# Altium PCB Parte_digital.PcbDoc
Units mm, origin at the board's own origin, x right, y up, seen from the top; angles counter-clockwise.
Board outline 150 x 100 mm, 2 copper layers (Top Layer, Bottom Layer); 92 components, 93 nets, 385 pads, 107 vias.
Unrouted connection lines stored in the file: 1.
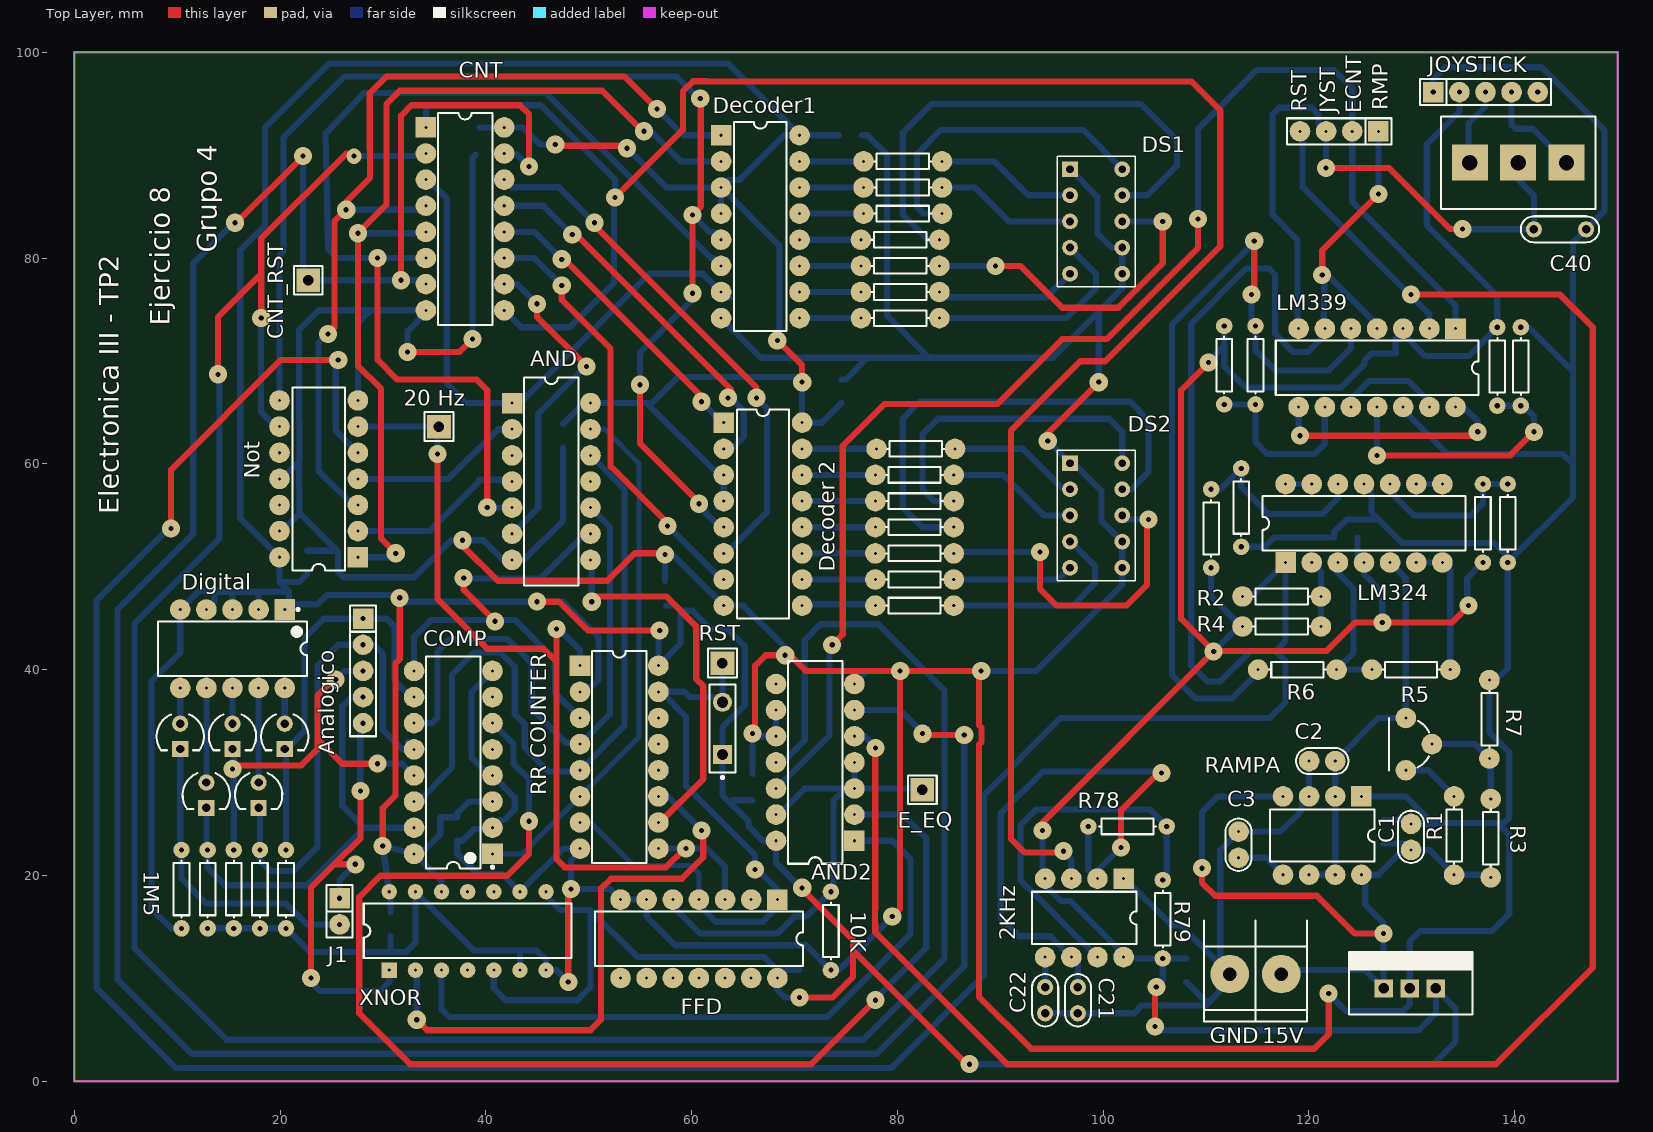
[diagram p0: Top Layer view]
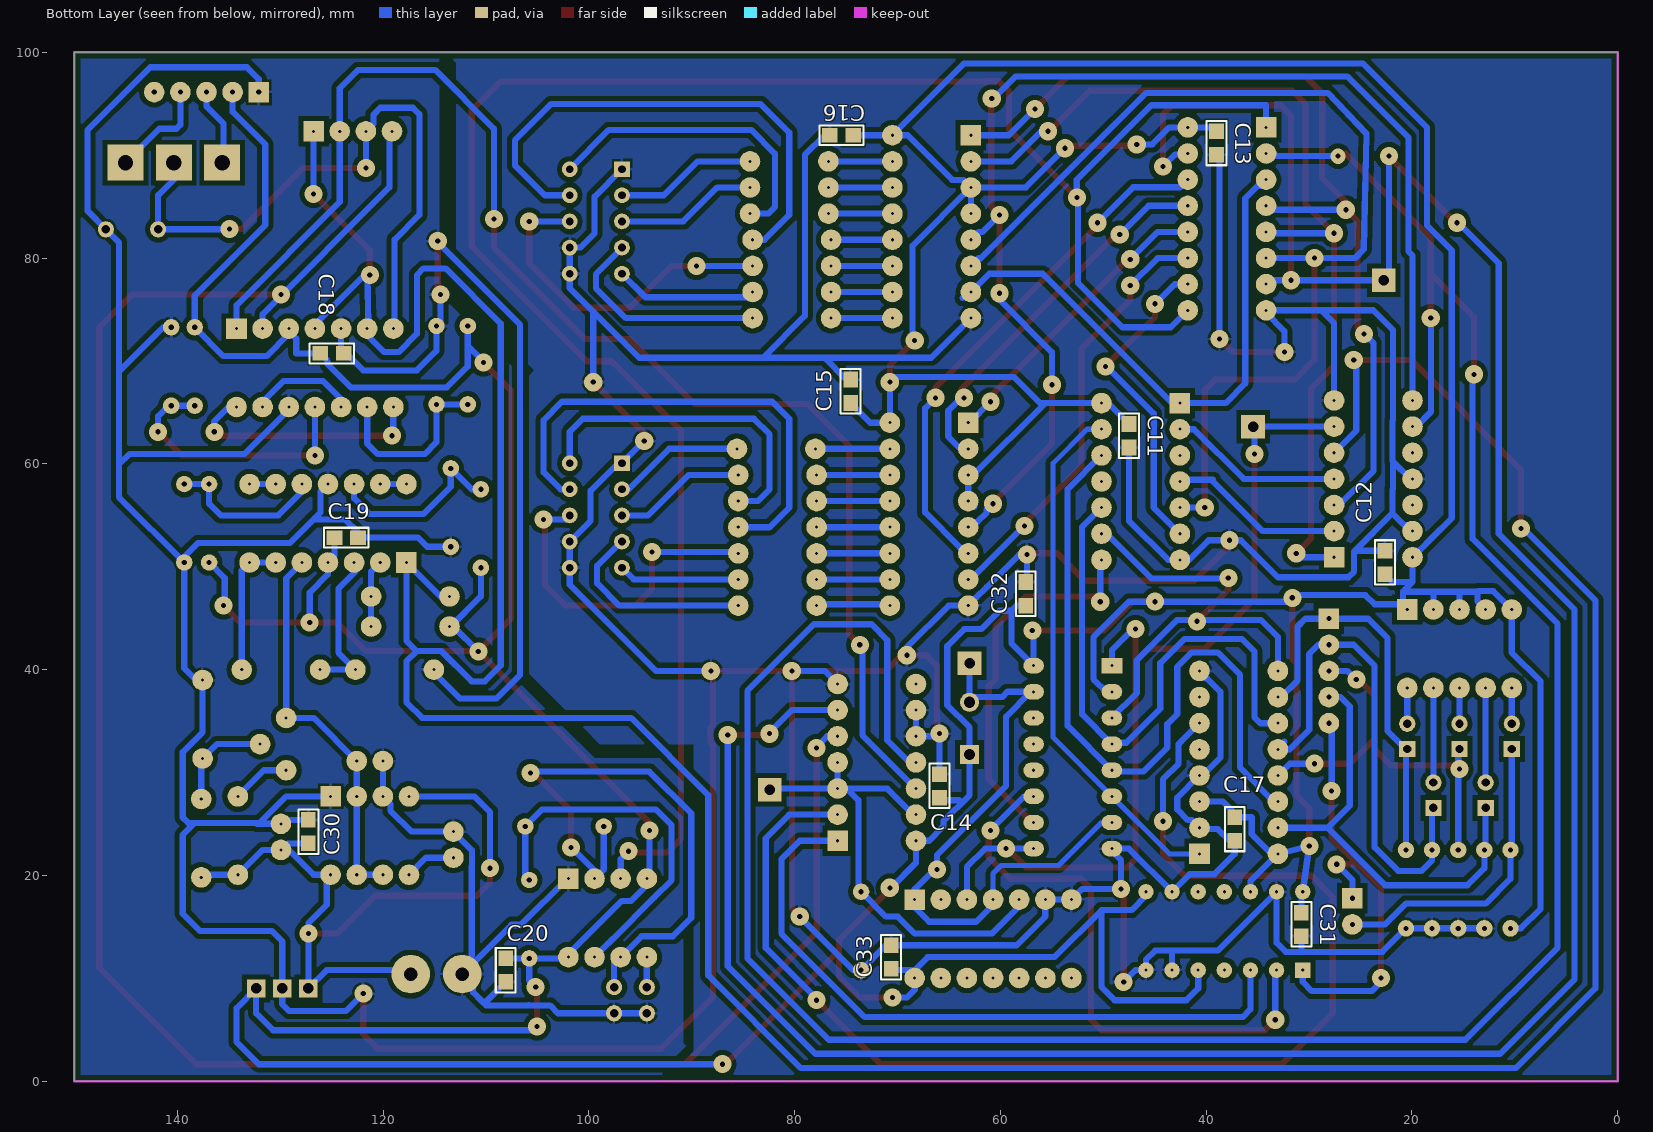
[diagram p1: Bottom Layer view, seen from below]

## Layer stack, top to bottom
Top Solder: solder mask 0.0102, Solder Resist, Dk 3.5
Top Layer: signal copper 0.0356
Dielectric 1: dielectric 0.32, FR-4, Dk 4.8
Bottom Layer: signal copper 0.0356
Bottom Solder: solder mask 0.0102, Solder Resist, Dk 3.5

## Board outline
0,0 150,0 150,100 0,100

## Design rules (kind name [scope] priority, off if disabled: settings)
Clearance [All] p1: gap=0.5
PolygonConnect [All] p1: connectstyle=Relief reliefconductorwidth=0.254 reliefentries=4 polygonreliefangle="90 Angle" airgapwidth=0.254
RoutingVias [All] p1: holewidth=0.5 width=1.75 viastyle="Through Hole" minholewidth=0.5 minwidth=1.75 maxholewidth=0.5 maxwidth=1.75
SolderMaskExpansion [All] p1: expansion=0.102
Width [All] p1: maxlimit=0.9 minlimit=0.5 preferedwidth=0.7
30 further rules are at their usual default settings.

## Classes and differential pairs
component class Esquematico: C1 C3 C40 JOYSTICK LM324 R1 R2 R3 R4 R5 R6 R7
component class Parte_digital: 10K "20 Hz" Analogico AND AND2 CNT_RST Decoder1 "Decoder 2" Digital DS1 DS2 E_EQ FFD J1 PULSE_RST R97 "RR COUNTER" XNOR

## Components (designator, comment, footprint, x,y, rotation, side; value= is the part's Value field where it differs from the comment)
1M5 "RES" AXIAL-0.3#1 10.414,18.669 r270 top
2KHz "LM555" DIP8 101.981,19.685 r270 top (schematic designator 555_2KHz)
5 "RES" AXIAL-0.3#2 80.518,84.328 r0 top
6 "RES" AXIAL-0.3#2 80.264,81.788 r0 top
7 "RES" AXIAL-0.3#2 80.264,79.248 r0 top
8 "RES" AXIAL-0.3#2 80.264,76.708 r0 top
9 "RES" AXIAL-0.3#2 80.264,74.168 r0 top
10 "RES" AXIAL-0.3#2 80.518,89.408 r0 top
10K "RES" AXIAL-0.3#1 73.533,14.605 r270 top
11 "RES" AXIAL-0.3#2 80.518,86.868 r0 top
12 "RES" AXIAL-0.3#2 81.661,56.388 r0 top
13 "RES" AXIAL-0.3#2 81.661,53.848 r0 top
14 "RES" AXIAL-0.3#2 81.661,51.308 r0 top
15 "RES" AXIAL-0.3#2 81.661,48.768 r0 top
16 "RES" AXIAL-0.3#2 81.661,46.228 r0 top
17 "RES" AXIAL-0.3#2 81.788,61.468 r0 top
18 "RES" AXIAL-0.3#2 81.661,58.928 r0 top
"20 Hz" "TP" TPTH 35.433,63.627 r0 top
Alimentacion1 "BORNERA 2" BORNERA2 114.808,10.414 r90 top
Analogico "CON5" SIP5 28.067,44.958 r270 top
AND "M74HC21B1R" DIP14#1 46.355,58.293 r270 top
AND2 "SN74HC08N" N014 72.009,30.988 r90 top
C1 "1p" CAP100#1 129.921,23.749 r90 top
C2 "220u" CAP100#1 121.285,31.115 r180 top
C3 "0.1u" CAP100#1 113.157,22.987 r90 top
C11 "100n" 0805 47.498,62.738 r270 bottom
C12 "100n" 0805 22.606,50.419 r90 bottom
C13 "100n" 0805 38.989,91.186 r270 bottom
C14 "100n" 0805 65.913,28.702 r90 bottom
C15 "100n" 0805 74.549,67.056 r90 bottom
C16 "100n" 0805 75.438,91.948 r0 bottom
C17 "100n" 0805 37.211,24.511 r270 bottom
C18 "100n" 0805 124.968,70.739 r180 bottom
C19 "100n" 0805 123.571,52.832 r180 bottom
C20 "100n" 0805 108.077,10.795 r270 bottom
C21 "4.7 uf" CAP100#2 97.536,7.874 r270 top
C22 "0.1u" CAP100#2 94.361,7.874 r270 top
C30 "100n" 0805 127.254,24.257 r90 bottom
C31 "100n" 0805 30.734,15.24 r270 bottom
C32 "100n" 0805 57.531,47.371 r90 bottom
C33 "100n" 0805 70.612,12.065 r90 bottom
C40 "1u" CAP200 144.399,82.804 r0 top
CNT "HCF4518BEY" DIP16#1 37.973,83.82 r270 top (schematic designator Unidad1)
CNT_RST "TP" TPTH 22.733,77.851 r90 top
COMP "HD74LS85P" PRDP0016AE-B 36.83,30.988 r180 top (schematic designator COMPARADOR)
D1 "LED0" LED3 10.287,33.528 r270 top
D2 "LED1" LED3 12.827,27.813 r270 top
D3 "LED2" LED3 15.367,33.528 r270 top
D4 "LED3" LED3 17.907,27.813 r270 top
D5 "LED4" LED3 20.447,33.528 r270 top
Decoder1 "4511" DIP16#2 62.865,91.948 r0 top
"Decoder 2" "CD4511" DIP16#2 63.119,64.008 r0 top
Digital "SW DIP-5" N10A 15.367,42.037 r270 top
DS1 "DISPLAY 7SEG K" "DISPLAY_LED_0.3\"" 99.314,83.566 r0 top
DS2 "DISPLAY 7SEG K" "DISPLAY_LED_0.3\"" 99.314,54.991 r0 top
E_EQ "TP" TPTH 82.423,28.321 r90 top
FFD "HCF4013BEY" DIP14#1 60.706,13.843 r180 top
J1 "JUMPER" JUMPER2 25.781,16.51 r270 top
JOYSTICK "CON5" SIP5 132.08,96.139 r0 top
LL? "TOGGLE_SWITCH" "TOOGLE SWITCH SIMPLE" 140.335,89.281 r270 top
LM324 "LM324N" N014 125.349,54.229 r0 top
LM339 "LM339AN" 646-06 126.619,69.342 r180 top
Not "CD4069UBCM" DIP14#2 27.559,50.927 r180 top
R1 "Res1" AXIAL-0.3#2 134.112,23.876 r270 top
R2 "Res1" AXIAL-0.3#2 117.348,47.117 r0 top
R3 "Res1" AXIAL-0.3#2 137.668,23.622 r270 top
R4 "Res1" AXIAL-0.3#2 117.348,44.196 r180 top
R5 "Res1" AXIAL-0.3#2 129.921,40.005 r0 top
R6 "Res1" AXIAL-0.3#2 118.872,40.005 r0 top
R7 "Res1" AXIAL-0.3#2 137.541,35.179 r270 top
R18 "RES" AXIAL-0.3#1 12.954,18.669 r90 top
R19 "RES" AXIAL-0.3#1 15.494,18.669 r90 top
R20 "RES" AXIAL-0.3#1 18.034,18.669 r90 top
R21 "RES" AXIAL-0.3#1 20.574,18.669 r90 top
R72 "Res1" AXIAL-0.3#1 139.319,54.229 r90 top
R77 "Res1" AXIAL-0.3#1 136.906,54.229 r270 top
R78 "Res1" AXIAL-0.3#1 102.362,24.765 r0 top
R79 "Res1" AXIAL-0.3#1 105.791,15.748 r90 top
R720 "Res1" AXIAL-0.3#1 113.411,55.753 r90 top
R721 "Res1" AXIAL-0.3#1 140.589,69.469 r270 top
R770 "Res1" AXIAL-0.3#1 110.49,53.721 r270 top
R772 "Res1" AXIAL-0.3#1 138.303,69.469 r90 top
R7221 "Res121" AXIAL-0.3#1 114.808,69.596 r270 top
R7711 "Res1" AXIAL-0.3#1 111.76,69.596 r90 top
RAMPA "LM555" DIP8 125.095,27.686 r270 top (schematic designator 555_RAMPA)
"Regulador de Tensión" "7805" "TO-220 V" 129.794,9.017 r0 top
"RESET RR" "SW-PB" SPST-2 62.992,34.29 r90 top
"RR COUNTER" "HCC4520BF" DIP16#3 52.959,31.496 r270 top
RST "CON4" SIP4 122.936,92.329 r180 top (schematic designator TPs)
RST "TP" TPTH 62.992,40.64 r90 top (schematic designator PULSE_RST)
T!1 "TRANSISTOR PNP" TO92 130.683,32.766 r90 top
XNOR "HCC4077BF" CDIP14 38.227,14.605 r0 top

## Footprints (in the part's own frame and the unit in brackets; to place one, negate y for a bottom-side part, rotate by r counter-clockwise, add the part's x,y. Pads: shape width x height; smd on the part's side, far side on the other; paste and mask are expansions set on the pad)
646-06 [mm] "DIP; 14 Leads; Row Spacing 7.62 mm; Pitch 2.54 mm"
  rect 2x2 hole 0.3: 1(-7.62,-3.81)
  round 2 hole 0.3: 2(-5.08,-3.81) 3(-2.54,-3.81) 4(0,-3.81) 5(2.54,-3.81) 6(5.08,-3.81) 7(7.62,-3.81) 8(7.62,3.81) 9(5.08,3.81) 10(2.54,3.81) 11(0,3.81) 12(-2.54,3.81) 13(-5.08,3.81) 14(-7.62,3.81)
  silkscreen extent -9.85,-2.65 9.85,2.65
0805 [mil] "Pasivo 0805"
  rect 60x56 smd: 1(-45,0) 2(45,0)
  silkscreen extent -85,-38 85,38, body extent -40,-25 39,25, height 15
AXIAL-0.3#1 [mm] "Axial Device, Thru-Hole; 2 Leads; 0.3 in Pin Spacing"
  round 1.6 hole 0.5: 1(-3.81,0) 2(3.81,0)
  silkscreen extent -2.77,-0.76 2.77,0.76
AXIAL-0.3#2 [mm] "Axial Device, Thru-Hole; 2 Leads; 0.3 in Pin Spacing"
  round 2 hole 0.3: 1(-3.81,0) 2(3.81,0)
  silkscreen extent -2.77,-0.76 2.77,0.76
BORNERA2 [mm] "Bornera con Tornillos 5mm separación"
  round 3.75 hole 1.3: 1(0,2.5) 2(0,-2.5)
  silkscreen extent -4.6,-5 5.2,5, body extent -3.76,-4.89 3.94,5.61, height 10
CAP100#1 [mm]
  round 2 hole 0.3: 1(-1.27,0) 2(1.27,0)
  silkscreen extent -2.54,-1.27 2.54,1.27, body extent -2.92,-0.84 2.92,0.86, height 6.12
CAP100#2 [mm]
  round 1.575 hole 0.813: 1(-1.27,0) 2(1.27,0)
  silkscreen extent -2.54,-1.27 2.54,1.27, body extent -2.92,-0.84 2.92,0.86, height 6.12
CAP200 [mil]
  round 62 hole 32: 1(-100,0) 2(100,0)
  silkscreen extent -150,-50 150,50, body extent -110,-46 110,44, height 246
CDIP14 [mm] "DIP; 14 Leads; Row Spacing 7.62 mm; Pitch 2.54 mm"
  rect 1.5x1.5 hole 0.3: 1(-7.62,-3.81)
  round 1.5 hole 0.3: 2(-5.08,-3.81) 3(-2.54,-3.81) 4(0,-3.81) 5(2.54,-3.81) 6(5.08,-3.81) 7(7.62,-3.81) 8(7.62,3.81) 9(5.08,3.81) 10(2.54,3.81) 11(0,3.81) 12(-2.54,3.81) 13(-5.08,3.81) 14(-7.62,3.81)
  silkscreen extent -10.1,-2.65 10.1,2.65
DIP8 [mm]
  rect 2x2 hole 0.3: 1(0,0)
  round 2 hole 0.3: 2(0,-2.54) 3(0,-5.08) 4(0,-7.62) 5(7.62,-7.62) 6(7.62,-5.08) 7(7.62,-2.54) 8(7.62,0)
  silkscreen extent 1.27,-8.89 6.35,1.27, body extent -0.06,-9.21 7.7,1.59, height 4.5
DIP14#1 [mm] "DIP; 14 Leads; Row Spacing 7.62 mm; Pitch 2.54 mm"
  rect 2x2 hole 0.3: 1(-7.62,-3.81)
  round 2 hole 0.3: 2(-5.08,-3.81) 3(-2.54,-3.81) 4(0,-3.81) 5(2.54,-3.81) 6(5.08,-3.81) 7(7.62,-3.81) 8(7.62,3.81) 9(5.08,3.81) 10(2.54,3.81) 11(0,3.81) 12(-2.54,3.81) 13(-5.08,3.81) 14(-7.62,3.81)
  silkscreen extent -10.1,-2.65 10.1,2.65
DIP14#2 [mm]
  rect 2x2 hole 0.3: 1(0,0)
  round 2 hole 0.3: 2(0,-2.54) 3(0,-5.08) 4(0,-7.62) 5(0,-10.16) 6(0,-12.7) 7(0,-15.24) 8(7.62,-15.24) 9(7.62,-12.7) 10(7.62,-10.16) 11(7.62,-7.62) 12(7.62,-5.08) 13(7.62,-2.54) 14(7.62,0)
  silkscreen extent 1.27,-16.51 6.35,1.27, body extent -0.13,-17.14 7.75,1.9, height 4.19
DIP16#1 [mm] "DIP; 16 Leads; Row Spacing 7.62 mm; Pitch 2.54 mm"
  rect 2x2 hole 0.3: 1(-8.89,-3.81)
  round 2 hole 0.3: 2(-6.35,-3.81) 3(-3.81,-3.81) 4(-1.27,-3.81) 5(1.27,-3.81) 6(3.81,-3.81) 7(6.35,-3.81) 8(8.89,-3.81) 9(8.89,3.81) 10(6.35,3.81) 11(3.81,3.81) 12(1.27,3.81) 13(-1.27,3.81) 14(-3.81,3.81) 15(-6.35,3.81) 16(-8.89,3.81)
  silkscreen extent -10.3,-2.65 10.3,2.65
DIP16#2 [mm]
  rect 2x2 hole 0.3: 1(0,0)
  round 2 hole 0.3: 2(0,-2.54) 3(0,-5.08) 4(0,-7.62) 5(0,-10.16) 6(0,-12.7) 7(0,-15.24) 8(0,-17.78) 9(7.62,-17.78) 10(7.62,-15.24) 11(7.62,-12.7) 12(7.62,-10.16) 13(7.62,-7.62) 14(7.62,-5.08) 15(7.62,-2.54) 16(7.62,0)
  silkscreen extent 1.27,-19.05 6.35,1.27, body extent -0.08,-18.89 7.79,1.11, height 1.98
DIP16#3 [mm] "DIP; 16 Leads; Row Spacing 7.62 mm; Pitch 2.54 mm"
  rect 2x2 / inner rect 1.5x2 / far side rect 1.5x2 hole 0.3: 1(-8.89,-3.81)
  round 2 / inner oval 1.5x2 / far side oval 1.5x2 hole 0.3: 2(-6.35,-3.81) 3(-3.81,-3.81) 4(-1.27,-3.81) 5(1.27,-3.81) 6(3.81,-3.81) 7(6.35,-3.81) 8(8.89,-3.81) 9(8.89,3.81) 10(6.35,3.81) 11(3.81,3.81) 12(1.27,3.81) 13(-1.27,3.81) 14(-3.81,3.81) 15(-6.35,3.81) 16(-8.89,3.81)
  silkscreen extent -10.3,-2.65 10.3,2.65
"DISPLAY_LED_0.3\"" [mil] "TOS-3104AG-B"
  rect 60x60 hole 30: 1(-100,200)
  round 60 hole 30: 2(-100,100) 3(-100,0) 4(-100,-100) 5(-100,-200) 6(100,-200) 7(100,-100) 8(100,0) 9(100,100) 10(100,200)
  silkscreen extent -150,-250 150,250, body extent -147,-248 147,248, height 240
JUMPER2 [mm]
  rect 2x2 hole 0.5: 1(-1.27,0)
  round 2 hole 0.5: 2(1.27,0)
  silkscreen extent -2.54,-1.27 2.54,1.27, body extent -2.46,-1.27 2.54,1.27, height 9.5
LED3 [mil]
  round 62 hole 32: 1(-48,0)
  rect 62x62 hole 32: 2(49,0)
  silkscreen extent -84,-90 54,90, body extent -65,-64 65,65, height 19
N10A [mm] "DIP; 10 Leads; Row Spacing 7.62 mm; Pitch 2.54 mm"
  rect 2x2 hole 0.3: 1(-3.81,5.08)
  round 2 hole 0.3: 2(-3.81,2.54) 3(-3.81,0) 4(-3.81,-2.54) 5(-3.81,-5.08) 6(3.81,-5.08) 7(3.81,-2.54) 8(3.81,0) 9(3.81,2.54) 10(3.81,5.08)
  silkscreen extent -3.93,-7.25 2.65,7.25, body extent -3.25,-7.25 3.25,7.25, height 5.08
N014 [mm] "DIP; 14 Leads; Row Spacing 7.62 mm; Pitch 2.54 mm"
  rect 2x2 hole 0.3: 1(-7.62,-3.81)
  round 2 hole 0.3: 2(-5.08,-3.81) 3(-2.54,-3.81) 4(0,-3.81) 5(2.54,-3.81) 6(5.08,-3.81) 7(7.62,-3.81) 8(7.62,3.81) 9(5.08,3.81) 10(2.54,3.81) 11(0,3.81) 12(-2.54,3.81) 13(-5.08,3.81) 14(-7.62,3.81)
  silkscreen extent -9.85,-2.65 9.85,2.65
PRDP0016AE-B [mm] "DIP, 16-Leads, Row Spacing 7.62mm, Pitch 2.54mm, Body 19.2x6.3mm"
  rect 2x2 hole 0.3: 1(-3.81,8.89)
  round 2 hole 0.3: 2(-3.81,6.35) 3(-3.81,3.81) 4(-3.81,1.27) 5(-3.81,-1.27) 6(-3.81,-3.81) 7(-3.81,-6.35) 8(-3.81,-8.89) 9(3.81,-8.89) 10(3.81,-6.35) 11(3.81,-3.81) 12(3.81,-1.27) 13(3.81,1.27) 14(3.81,3.81) 15(3.81,6.35) 16(3.81,8.89)
  silkscreen extent -3.94,-10.3 2.65,10.31, body extent -3.6,-10.28 3.6,10.28, height 5.06
SIP4 [mm]
  rect 2x2 hole 0.3: 1(-3.81,0)
  round 2 hole 0.3: 2(-1.27,0) 3(1.27,0) 4(3.81,0)
  silkscreen extent -5.08,-1.27 5.08,1.27, body extent -5.08,-1.27 5.08,1.27, height 8.38
SIP5 [mm]
  rect 2x2 hole 0.5: 1(0,0)
  round 2 hole 0.5: 2(2.54,0) 3(5.08,0) 4(7.62,0) 5(10.16,0)
  silkscreen extent -1.27,-1.27 11.43,1.27, body extent -1.27,-1.27 11.43,1.27, height 8.38
SPST-2 [mm] "Switch; 2 Leads"
  rect 1.85x1.85 hole 1.1: 1(-2.54,0)
  round 1.85 hole 1.1: 2(2.54,0)
  silkscreen extent -4.89,-1.27 4.28,1.27
TO92 [mm]
  round 2 hole 0.3: 1(0,-1.27) 2(2.54,1.27) 3(-2.54,1.27)
  silkscreen extent -2.54,-1 2.54,2.92, body extent -2.79,-1.55 2.79,2.79, height 8
"TO-220 V" [mil]
  rect 70x70 hole 40: 1(-100,0) 2(0,0) 3(100,0)
  silkscreen extent -232,-100 240,139, body extent -197,-79 197,118, height 709
"TOOGLE SWITCH SIMPLE" [mm]
  rect 3.5x3.5 hole 1.5: 1(0,4.699) 2(0,0) 3(0,-4.699)
  silkscreen extent -4.5,-7.5 4.5,7.5, body extent -3.43,-6.36 3.43,6.36, height 28.55
TPTH [mm]
  rect 2.3x2.3 hole 1.016: 1(0,0)
  silkscreen extent -1.4,-1.4 1.4,1.4, body extent -1.27,-1.27 1.27,1.27, height 6.04

## Part data
2KHz RAMPA: "Timer"
AND: "Dual 4-Input AND Gate"
AND2: "Quadruple 2-Input Positive-AND Gate"
C1 C2 C3 C11 C12 C13 C14 C15 C16 C17 C18 C19 C20 C21 C22 C30 C31 C32 C33 C40: library part CAP
CNT: "Dual Up-Counter"
COMP: "4-bit Magnitude Comparator"
D1: "Typical INFRARED GaAs LED"
D2 D3 D4 D5: library part LED0, "Typical INFRARED GaAs LED"
Decoder1: library part CD4511, "BCD to 7 SEGMENTOS"
"Decoder 2": "BCD to 7 SEGMENTOS"
Digital: "DIP Switch, 5 Position, SPST"
DS1 DS2: "Display 7 Segmentos Catodo Común"
FFD: "Dual D-Type Flip-Flop"
LL?: "Pulsador con reteción"
LM324: "Quadruple Operational Amplifier"
LM339: "Quad Single-Supply Comparator"
Not: "Hex Inverter, 14-Pin SOIC"
R1 R2 R3 R4 R5 R6 R7 R72 R77 R78 R79 R720 R721 R770 R772 R7711: "Resistor"
R7221: library part Res1, "Resistor"
"Regulador de Tensión": library part 78XX, "REGULDOR POSITIVO"
"RESET RR": "Switch"
"RR COUNTER": "Dual Binary Up-Counter"
XNOR: "Quad Exclusive NOR Gate"

## Free pads (board coordinates)
  round 3.25 on Top Overlay: 0(2.667,2.794) 0(2.667,97.536) 0(146.558,2.794) 0(147.447,97.409)

## Via types
v1: diameter 1.77, hole 0.5, Top Layer to Bottom Layer, 57 vias
v2: diameter 1.75, hole 0.5, Top Layer to Bottom Layer, 49 vias
v3: diameter 1.5, hole 0.5, Top Layer to Bottom Layer, 1 vias

## Nets (pads, with @x,y where several pads share a name; then routed paths per layer and width w, separated by ;. In a path a pad name is that pad's centre, name@x,y a point inside that pad or via, vN(x,y) a via of type N, cw(c..) or ccw(c..) an arc to the next point about the centre after c; other vN are vias at no path point)
15V: "Regulador de Tensión.1" Alimentacion1.2 C1.1 C30.1 R1.2 R3.2 RAMPA.4 RAMPA.8 | length 74.6
  Top Layer w0.6: v2(109.601,20.701) 109.601,19.304 110.871,18.034 120.777,18.034 124.46,14.351 v2(127.254,14.351)
  Bottom Layer w0.6: v2(109.601,20.701) 109.601,26.162 111.125,27.686 RAMPA.4 ; Alimentacion1.2 117.689,10.795 125.476,10.795 127.254,9.017 v2(127.254,14.351) 127.254,15.367 125.476,17.145 125.476,19.685 RAMPA.8 126.746,20.066 129.159,22.479 C1.1 131.699,22.479 R1.2 137.414,20.066 R3.2 ; C30.1 C1.1@129.286,23.114
!B1: AND.2 Not.4 | length 17
  Bottom Layer w0.6: Not.4 36.359,58.547 41.185,63.373 AND.2
!C1: AND.4 Not.2 | length 17.1
  Bottom Layer w0.6: Not.2 34.51,53.467 39.336,58.293 ; 39.336,58.454 42.384,58.454 AND.4
A1: AND.1 CNT.3 Decoder1.7 | length 55.6
  Bottom Layer w0.6: CNT.3 34.163,87.04 34.971,87.04 36.195,85.816 36.195,67.818 38.1,65.913 AND.1 43.307,65.913 55.88,78.486 61.081,78.486 62.859,76.708 Decoder1.7 63.083,76.708 63.673,76.118
B1: CNT.4 Decoder1.1 Not.3 | length 89.7
  Top Layer w0.6: v2(24.638,72.644) 25.273,73.279 25.273,83.566 v1(26.416,84.709) 26.416,85.471 28.728,87.783 28.728,90.558 28.702,90.584 28.702,96.012 30.353,97.663 53.467,97.663 v1(56.642,94.488) ; CNT.4 CNT.4@34.163,85.68
  Bottom Layer w0.6: v2(24.638,72.644) 23.715,71.721 23.715,59.343 27.051,56.007 Not.3 ; v1(26.416,84.709) 33.782,84.709 CNT.4 ; v1(56.642,94.488) 59.182,91.948 Decoder1.1
C1: CNT.5 Decoder1.2 Not.1 | length 93.2
  Top Layer w0.6: v1(31.242,51.308) 29.811,52.739 29.811,67.31 27.559,69.562 v1(27.559,82.423) 30.353,85.217 30.353,94.996 31.623,96.266 51.308,96.266 55.245,92.329 v1(55.372,92.329) ; CNT.5 34.163,83.11 CNT.5@34.193,83.14
  Bottom Layer w0.6: Not.1 30.861,50.927 v1(31.242,51.308) ; v1(55.372,92.329) 56.007,92.329 58.928,89.408 Decoder1.2
  Bottom Layer w0.635: v1(27.559,82.423) CNT.5@34.036,82.423
CLK_2KHZ: 2KHz.3 CNT.1 CNT.9 | length 203.6
  Top Layer w0.6: v2(52.564,85.9) 59.148,92.483 59.148,96.202 60.135,97.189 61.531,97.189 61.565,97.155 108.585,97.155 111.379,94.361 111.379,81.153 100.203,69.977 97.79,69.977 91.025,63.212 91.025,23.573 92.373,22.225 96.012,22.225 v2(96.139,22.352)
  Bottom Layer w0.6: CNT.1 34.163,94.869 45.309,94.869 52.564,87.614 v2(52.564,85.9) ; CNT.9@41.394,75.319 43.434,73.279 48.133,73.279 52.451,77.597 v2@52.451,86.013 ; v2(96.139,22.352) 96.901,21.59 2KHz.3
CLK_RAMPA: "20 Hz.1" "RR COUNTER.1" "RR COUNTER.9" FFD.3 Not.6 | length 88.9
  Top Layer w0.6: v1(35.306,60.96) 35.306,46.863 40.132,42.037 45.593,42.037 46.736,40.894 ; v1(46.863,43.942) 46.863,21.59 47.668,20.785 57.488,20.785 59.309,22.606 v1(59.436,22.606)
  Bottom Layer w0.6: Not.6 35.433,63.627 35.306,63.5 v1(35.306,60.96) ; v1(46.863,43.942) 47.117,43.942 49.149,41.91 49.149,40.386 ; 56.769,22.606 v1(59.436,22.606) 61.468,22.606 63.246,20.828 FFD.3@63.246,18.415
D1: AND.5 CNT.6 Decoder1.6 | length 103.4
  Top Layer w0.6: v1(29.464,80.01) 29.464,70.104 31.369,68.199 39.116,68.199 40.132,67.183 v1(40.132,55.753) ; CNT.6@33.945,80.01 CNT.6
  Bottom Layer w0.6: CNT.6@33.565,80.01 v1(29.464,80.01) 25.527,80.01 24.681,80.856 24.404,92.089 28.185,96.06 45.829,96.06 61.901,79.988 62.125,79.988 Decoder1.6 ; v1(40.132,55.753) AND.5
E2: "RR COUNTER.10" AND.8 | length 37
  Top Layer w0.6: v1(50.292,46.609) 50.292,46.736 50.673,47.117 57.531,47.117 60.452,44.196 60.452,39.086 61.121,38.417 61.121,29.371 56.896,25.146 56.769,25.146
  Bottom Layer w0.6: AND.8 50.292,50.546 v1(50.292,46.609)
E_2C: AND.6 CNT.10 | length 31.8
  Top Layer w0.6: CNT.10@41.783,76.88 CNT.10 ; v2(44.958,75.565) 44.958,74.295 v1(49.784,69.469)
  Bottom Layer w0.6: CNT.10 43.053,77.47 v2(44.958,75.565) ; AND.6@42.13,52.798 AND.6@42.164,52.832 ; AND.6 42.551,53.213 45.085,55.747 45.085,64.897 v1@49.593,69.406
E_CNT: AND2.12 LM339.1 RST.2 | length 135.7
  Top Layer w0.6: v2(73.66,42.418) 74.676,43.434 74.676,61.744 78.74,65.808 89.684,65.808 96.012,72.136 100.33,72.136 109.22,81.026 v2(109.22,83.82)
  Bottom Layer w0.6: AND2.12 68.205,28.448 73.406,33.649 73.406,42.164 v2(73.66,42.418) ; v2(109.22,83.82) 109.22,92.583 114.935,98.298 122.428,98.298 124.206,96.52 RST.2 124.206,85.471 134.239,75.438 LM339.1
ENABLE_CONTADOR: AND2.11 CNT.2 Not.9 | length 252.2
  Top Layer w0.6: v1(13.97,68.707) 13.97,74.295 18.161,78.486 ; v1(18.161,74.168) 18.161,81.915 26.416,90.17 26.67,90.17 26.924,89.916 v3(27.178,89.916)
  Bottom Layer w0.6: v1(13.97,68.707) 14.097,68.58 14.097,52.705 5.842,44.45 5.842,12.988 14.8,4.03 76.674,4.03 84.582,11.938 84.582,37.943 78.118,44.407 72.517,44.407 70.993,42.883 70.993,33.147 68.834,30.988 AND2.11 ; v1(18.161,74.168) 18.139,74.146 18.139,65.046 Not.9@19.558,63.627 ; v3(27.178,89.916) 33.147,89.916 33.782,90.551 CNT.2 CNT.2@34.163,89.58
EQ: AND2.2 COMP.6 | length 124.2
  Top Layer w0.6: v1(44.196,25.273) 44.196,22.098 42.063,19.965 29.753,19.965 27.686,17.898 27.686,6.604 32.639,1.651 71.628,1.651 v2(77.851,7.874)
  Bottom Layer w0.6: COMP.6 40.646,34.798 42.44,33.004 42.44,32.998 42.672,32.766 42.672,30.861 44.196,29.337 v1(44.196,25.273) ; AND2.2 80.518,25.908 82.804,23.622 82.804,12.954 77.851,8.001 v2(77.851,7.874)
GND: 2KHz.1 10K.2 "Decoder 2.8" "Regulador de Tensión.2" "RR COUNTER.8" Alimentacion1.1 AND2.7 AND2.9 AND2.10 AND.7 C1.2 C2.2 C3.2 C11.2 C12.2 C13.2 C14.2 C15.2 C16.2 C17.2 C18.2 C19.2 C20.2 C21.2 C22.2 C30.2 C31.2 C32.2 C33.2 C40.2 CNT.8 COMP.2 COMP.4 COMP.8 Decoder1.8 DS1.1 DS1.6 DS1.7 DS2.1 DS2.6 DS2.7 FFD.6 FFD.7 JOYSTICK.1 LM324.11 LM339.5 LM339.12 Not.7 Not.11 Not.13 R6.1 R7.1 R18.1 R19.1 R20.1 R21.1 R72.1 R720.1 R721.1 R7221.1 RAMPA.1 RAMPA.3 XNOR.6 XNOR.7 XNOR.9 XNOR.13 | length 924.9
  Top Layer w0.6: v2(32.385,70.866) 37.431,70.866 v1(38.701,72.136) ; v1(37.719,52.578) 37.719,52.07 41.148,48.641 51.816,48.641 54.483,51.308 57.277,51.308 v1(57.404,51.181) ; COMP.8 COMP.8@40.776,39.878 ; v2(48.006,9.652) 48.006,18.415 v1(48.26,18.669) ; v2(65.913,33.782) 66.167,34.036 66.167,40.386 67.183,41.402 v1(69.088,41.402) 69.564,41.402 71.088,39.878 v1(80.264,39.878) ; AND2.7 AND2.7@75.946,38.608 ; v1(79.502,16.002) 80.264,16.764 v1(80.264,39.878) ; v1(94.615,62.23) 94.615,62.992 v1(99.568,67.945) ; v2(114.427,76.454) 114.681,76.708 v2(114.681,81.661) ; v2(121.92,8.509) 121.92,4.572 120.499,3.151 92.988,3.151 87.918,8.221 87.918,32.703 88.172,32.957 88.172,34.353 87.918,34.607 87.918,39.878 v1(80.264,39.878)
  Bottom Layer w0.6: R18.1 R19.1 R20.1 R21.1 22.86,12.573 30.734,12.573 ; Not.13 19.939,54.057 20.747,54.057 21.889,55.199 ; Not.11 20.157,58.547 21.844,60.234 ; C12.2 25.526,51.562 ; Not.7 27.559,73.66 28.829,74.93 ; C31.2 30.734,12.573 ; v2(32.385,70.866) 32.385,72.898 34.163,74.676 CNT.8 28.829,74.93 ; v1(38.701,72.136) 38.701,89.755 C13.2 ; COMP.4@40.341,29.718 38.608,31.451 38.608,37.852 39.894,39.138 40.036,39.138 COMP.8@40.776,39.878 ; COMP.4 40.646,29.718 42.799,27.565 42.799,26.416 41.761,25.378 41.38,25.378 COMP.2 40.513,24.511 38.862,24.511 37.719,23.368 C17.2 37.211,22.098 39.194,20.115 41.607,20.115 XNOR.9 47.498,22.606 49.149,22.606 49.149,22.352 48.26,21.463 v1(48.26,18.669) 52.07,18.669 FFD.7 FFD.6 55.626,16.002 58.42,13.208 C33.2 71.12,13.208 10K.2 74.295,10.795 v1(79.502,16.002) ; XNOR.6 43.307,12.7 ; C11.2 47.498,54.483 43.688,50.673 AND.7 41.656,50.673 39.751,52.578 v1(37.719,52.578) 36.621,52.578 33.02,48.977 26.165,48.977 25.609,49.533 25.609,51.479 25.526,51.562 ; v2(48.006,9.652) 46.863,10.795 XNOR.7 45.847,11.811 44.958,12.7 43.307,12.7 ; C32.2@57.404,48.641 v1(57.404,51.181) 58.166,51.181 61.319,48.028 61.319,48.022 62.373,46.968 62.379,46.968 63.119,46.228 65.024,46.228 69.088,42.164 v1(69.088,41.402) ; Decoder1.8 66.709,70.324 77.089,70.324 ; C14.2 v2@65.913,33.274 ; v2(65.913,33.782) v2@65.913,33.274 ; AND2.9 AND2.10 66.167,33.528 v2@65.913,33.274 ; C15.2 74.964,68.199 77.089,70.324 ; AND2.7 77.089,39.878 v1(80.264,39.878) ; C16.2 77.089,91.948 78.994,90.043 78.994,74.388 83.058,70.324 ; v1(88.138,39.878) 93.472,39.878 101.854,48.26 DS2.6 DS2.7 99.822,54.483 99.822,57.404 97.155,60.071 DS2.1 v1(94.615,62.23) ; C22.2 C21.2 102.997,6.604 103.759,7.366 105.826,7.366 ; DS1.1 99.441,85.979 99.441,82.423 100.838,81.026 DS1.7 DS1.6 101.854,77.089 99.568,74.803 ; v1(99.568,67.945) 99.568,74.803 ; 2KHz.1 102.108,19.685 106.553,15.24 ; 105.826,7.39 105.85,7.39 105.874,7.366 109.982,7.366 110.363,7.747 ; C20.2 109.982,7.747 110.363,7.747 ; Alimentacion1.1@111.252,10.414 111.252,8.636 110.363,7.747 ; 111.379,12.192 111.379,20.927 111.357,20.949 111.357,22.463 113.151,24.257 C3.2 117.221,24.257 119.275,26.311 119.275,26.946 RAMPA.3 C2.2 ; Alimentacion1.1 107.597,15.125 ; R720.1 115.697,51.943 116.586,52.832 C19.2@121.963,52.832 ; v2(114.427,76.454) 114.427,73.787 R7221.1 114.808,70.993 116.713,69.088 121.92,69.088 124.079,71.247 LM339.5 ; v2(114.681,81.661) 114.681,81.534 106.68,73.533 106.68,39.497 108.966,37.211 112.522,37.211 115.062,39.751 R6.1 ; v2(121.92,8.509) 123.614,6.815 129.116,6.815 129.794,7.493 129.794,9.017 129.794,13.589 130.81,14.605 137.795,14.605 139.468,16.278 139.468,23.937 138.303,25.102 ; C19.2 122.428,53.34 123.698,54.61 126.746,54.61 ; RAMPA.1 129.413,27.686 131.997,25.102 138.303,25.102 ; LM324.11 126.089,57.299 126.089,55.267 126.746,54.61 ; C30.2 C1.2@129.54,25.4 ; LM339.12 129.159,65.278 133.477,60.96 144.653,60.96 145.669,59.944 ; C1.2 132.251,25.019 ; JOYSTICK.1 132.08,97.409 133.223,98.552 142.621,98.552 148.717,92.456 148.717,84.582 C40.2 145.669,81.534 145.669,68.961 ; R721.1 141.351,73.279 145.669,68.961 ; 21.844,60.234 21.844,57.558 21.889,57.513 21.889,55.199 ; 21.844,60.234 21.889,60.279 21.889,64.217 21.844,64.262 21.844,73.025 23.749,74.93 28.829,74.93 ; 21.889,55.199 25.526,51.562 ; 30.734,12.573 32.258,12.573 33.147,13.462 XNOR.13 38.862,12.7 43.307,12.7 ; 77.089,70.324 83.058,70.324 ; 83.058,70.324 95.089,70.324 99.568,74.803 ; 106.553,15.24 107.482,15.24 107.597,15.125 ; 106.553,15.24 106.668,15.125 107.597,15.125 ; 126.746,54.61 129.032,52.324 137.963,52.324 139.319,50.968 R72.1 ; 138.303,25.102 138.938,25.102 139.468,25.632 139.468,31.988 137.541,33.915 R7.1 138.176,38.989 139.319,40.132 R72.1 ; R72.1 145.669,56.769 145.669,59.944 ; 145.669,59.944 145.669,68.961
IN_FFD: 10K.1 AND2.3 AND2.4 AND2.13 E_EQ.1 FFD.5 | length 47.5
  Bottom Layer w0.6: FFD.5 58.166,17.018 60.833,14.351 68.326,14.351 69.977,16.002 71.12,16.002 10K.1 73.787,18.669 73.787,27.305 74.93,28.448 AND2.3 ; AND2.13 68.453,25.908 70.993,28.448 AND2.3 ; AND2.4 AND2.3 ; E_EQ.1@81.788,28.448 AND2.3
JOYSTICK: C40.1 LL?.2 LM339.7 RST.3 | length 62
  Top Layer w0.6: v2(121.666,88.773) 127.762,88.773 133.699,82.836 v2(134.906,82.836)
  Bottom Layer w0.6: LM339.7@118.872,73.279 118.872,81.788 116.459,84.201 116.459,93.98 117.094,94.615 120.269,94.615 120.926,93.958 120.926,93.069 RST.3 v2(121.666,88.773) ; v2(134.906,82.836) 134.937,82.804 C40.1 141.859,86.106 140.335,87.63 LL?.2
LE: "Decoder 2.5" Decoder1.5 Not.8 | length 121
  Top Layer w0.6: v1(54.991,67.691) 54.991,61.976 v1@60.77,56.197 ; v1(60.071,76.581) v1(60.071,84.201) 60.876,85.006 60.876,95.461 v1(60.833,95.504) ; Decoder1.5 Decoder1.5@62.865,82.528
  Bottom Layer w0.6: Not.8 19.939,80.264 20.32,80.645 20.32,91.694 26.289,97.663 58.517,97.663 60.676,95.504 v1(60.833,95.504) ; v1(54.991,67.691) 54.991,70.866 60.071,75.946 v1(60.071,76.581) ; v1(60.071,84.201) 61.744,82.528 62.125,82.528 Decoder1.5 ; v1(60.706,56.134) 61.341,55.499 61.341,55.245 62.23,54.356 62.611,54.356
MRFFD: "RESET RR.2" "RR COUNTER.7" "RR COUNTER.15" FFD.1 FFD.4 RST.1@62.992,40.64 | length 62.1
  Top Layer w0.6: 56.642,37.846 56.769,37.846
  Bottom Layer w0.5: 49.149,25.146 50.165,25.146 54.34,20.971 59.928,20.971 60.706,20.193 FFD.4@60.706,18.415
  Bottom Layer w0.6: FFD.4 60.706,17.145 62.357,15.494 66.929,15.494 68.326,16.891 FFD.1 68.326,18.669 66.421,20.574 v1(66.167,20.574) 66.167,21.971 59.436,28.702 59.436,35.433 57.023,37.846 56.769,37.846 59.309,37.846 59.817,37.338 62.484,37.338 62.992,36.83 RST.1@62.992,40.64 ; FFD.4@60.706,18.415 60.706,17.948 FFD.4@60.853,17.8
Net1M5_1: 1M5.1 D1.2 J1.2 | length 29
  Bottom Layer w0.6: 1M5.1@10.287,22.606 D1.2 ; 1M5.1 10.414,19.685 12.827,17.272 20.574,17.272 22.606,15.24 J1.2@25.146,15.24
Net555_2KHz_5: 2KHz.5 C22.1 | length 2.9
  Bottom Layer w0.6: C22.1 2KHz.5
Net555_2KHz_7: 2KHz.7 R78.2 R79.2 | length 36.8
  Bottom Layer w0.6: 2KHz.7 98.701,12.805 98.701,12.811 97.647,13.865 97.641,13.865 93.621,17.885 93.615,17.885 91.948,19.552 91.948,24.892 93.472,26.416 104.521,26.416 R78.2 106.172,19.939 R79.2
Net555_RAMPA_2: C2.1 LM324.5 RAMPA.2 RAMPA.6 RAMPA.7 T!1.2 | length 37.9
  Bottom Layer w0.6: RAMPA.6 RAMPA.7 RAMPA.2 C2.1 126.746,35.306 T!1.2 129.413,48.889 127.889,50.413 LM324.5
Net555_RAMPA_5: C3.1 RAMPA.5 | length 5
  Bottom Layer w0.6: C3.1 115.824,21.717 RAMPA.5
Net_1: 7.1 Decoder1.11 | length 6
  Bottom Layer w0.6: Decoder1.11 7.1
Net_1: 10.1 Decoder1.15 | length 6.2
  Bottom Layer w0.6: Decoder1.15 10.1
Net_1: 16.1 "Decoder 2.9" | length 7.1
  Bottom Layer w0.6: 70.739,46.355 16.1@77.851,46.355
Net_1: 9.1 Decoder1.9 | length 6
  Bottom Layer w0.6: Decoder1.9 9.1
Net_1: 14.1 "Decoder 2.11" | length 7.1
  Bottom Layer w0.6: 70.739,51.308 14.1
Net_1: 8.1 Decoder1.10 | length 6
  Bottom Layer w0.6: Decoder1.10 8.1
Net_1: 15.1 "Decoder 2.10" | length 7.1
  Bottom Layer w0.6: 70.739,48.768 15.1
Net_1: 6.1 Decoder1.12 | length 6
  Bottom Layer w0.6: Decoder1.12 6.1
Net_1: 13.1 "Decoder 2.12" | length 7.1
  Bottom Layer w0.6: 70.739,53.848 13.1
Net_1: 12.1 "Decoder 2.13" | length 7.1
  Bottom Layer w0.6: 70.739,56.388 12.1
Net_1: 5.1 Decoder1.13 | length 6.2
  Bottom Layer w0.6: Decoder1.13 5.1
Net_1: 17.1 "Decoder 2.15" | length 7.2
  Bottom Layer w0.6: 70.739,61.468 17.1
Net_1: 11.1 Decoder1.14 | length 6.2
  Bottom Layer w0.6: Decoder1.14 11.1
Net_1: 18.1 "Decoder 2.14" | length 7.1
  Bottom Layer w0.6: 70.739,58.928 18.1
Net_2: 7.2 DS1.8 | length 33.2
  Top Layer w0.6: v1(89.535,79.248) 91.948,79.248 96.012,75.184 101.473,75.184 105.791,79.502 v1(105.791,83.566)
  Bottom Layer w0.6: 7.2 v1(89.535,79.248) ; DS1.8 v1(105.791,83.566)
Net_2: 15.2 DS2.5 | length 11.8
  Bottom Layer w0.6: 15.2 95.631,48.768 DS2.5
Net_2: 6.2 DS1.9 | length 50.8
  Bottom Layer w0.6: 6.2 82.931,81.788 80.518,84.201 80.518,92.202 83.312,94.996 103.632,94.996 107.188,91.44 107.188,89.027 104.267,86.106 DS1.9
Net_2: 10.2 DS1.2 | length 13.8
  Bottom Layer w0.6: 10.2 89.408,89.408 92.71,86.106 DS1.2
Net_2: 11.2 DS1.3 | length 13.8
  Bottom Layer w0.6: 11.2 87.503,86.868 90.805,83.566 DS1.3
Net_2: 9.2 DS1.4 | length 21.4
  Bottom Layer w0.6: 9.2 96.393,74.168 99.314,77.089 99.314,78.42 DS1.4@96.774,80.96
Net_2: 8.2 DS1.5 | length 13.9
  Bottom Layer w0.6: 8.2 84.582,76.2 94.488,76.2 DS1.5
Net_2: 16.2 DS2.4 | length 19.6
  Bottom Layer w0.6: 16.2 97.028,46.228 99.187,48.387 99.187,50.107 DS2.4@96.843,52.451
Net_2: 12.2 DS2.10 | length 32.5
  Bottom Layer w0.6: 12.2 83.566,56.388 82.423,57.531 82.423,62.865 83.947,64.389 100.584,64.389 101.854,63.119 DS2.10
Net_2: 13.2 DS2.9 | length 48.4
  Bottom Layer w0.6: 13.2@85.471,54.229 13.2 82.423,53.848 80.518,55.753 80.518,64.389 82.169,66.04 102.616,66.04 104.394,64.262 104.394,59.182 102.743,57.531 DS2.9
Net_2: 14.2 DS2.8 | length 33.5
  Top Layer w0.6: v1(93.853,51.435) 93.853,47.879 95.504,46.228 102.235,46.228 104.267,48.26 104.267,54.737 v1(104.394,54.61)
  Bottom Layer w0.6: 14.2 85.725,51.054 86.106,51.435 v1(93.853,51.435) ; DS2.8 102.235,54.61 v1(104.394,54.61)
Net_2: 18.2 DS2.3 | length 12.9
  Bottom Layer w0.6: 18.2 90.297,58.928 94.234,54.991 DS2.3
Net_2: 17.2 DS2.2 | length 12.8
  Bottom Layer w0.6: 17.2 92.202,61.468 96.139,57.531 DS2.2
Net_2: 5.2 DS1.10 | length 30.7
  Top Layer w0.6: DS1.10@101.574,88.366 DS1.10
  Bottom Layer w0.6: 5.2 82.55,84.328 81.915,84.963 81.915,90.17 84.201,92.456 98.044,92.456 DS1.10
NetAnalogico_1: Analogico.1 COMP.10 D5.2 R21.2 | length 39
  Bottom Layer w0.6: D5.2 20.61,32.283 22.352,34.025 22.352,43.053 24.257,44.958 Analogico.1 30.353,44.958 31.115,44.196 31.115,38.946 32.723,37.338 COMP.10 ; R21.2 D5.2@20.574,32.156
NetAnalogico_2: Analogico.2 COMP.12 D4.2 R20.2 | length 49.9
  Top Layer w0.6: Analogico.2 Analogico.2@28.575,42.418
  Bottom Layer w0.6: D4.2 18.034,26.441 R20.2 18.034,21.463 19.05,20.447 21.336,20.447 23.622,22.733 23.622,40.386 25.654,42.418 Analogico.2 29.083,42.418 29.972,41.529 29.972,34.163 31.877,32.258 COMP.12 ; COMP.12@32.385,33.02 COMP.12@33.02,32.385
NetAnalogico_3: Analogico.3 COMP.13 D3.2 R19.2 | length 40.5
  Top Layer w0.6: v2(15.367,30.353) 15.71,30.696 22.06,30.696 23.622,32.258 23.622,33.274 ; v2(25.4,39.052) 25.209,39.052 23.622,37.465 23.622,33.274 ; v2(29.464,30.861) 26.035,30.861 23.622,33.274
  Bottom Layer w0.6: D3.2@15.367,32.156 D3.2 ; R19.2 D3.2@15.494,32.156 ; v2(25.4,39.052) 25.4,38.989 26.289,39.878 Analogico.3 ; v2(29.464,30.861) 31.877,30.861 COMP.13
NetAnalogico_4: Analogico.4 COMP.15 D2.2 R18.2 | length 44.1
  Bottom Layer w0.6: R18.2@12.827,22.606 D2.2 ; R18.2 12.954,20.701 14.605,19.05 22.606,19.05 28.194,24.638 ; Analogico.4@28.018,37.251 Analogico.4@28.067,37.251 ; Analogico.4@28.067,37.202 Analogico.4@28.067,37.251 ; COMP.15 28.194,24.638 ; Analogico.4@28.067,37.251 Analogico.4 26.924,37.338 26.035,36.449 26.035,26.797 28.194,24.638
NetCNT_11: "Decoder 2.7" CNT.11 | length 42.7
  Top Layer w0.6: CNT.11@41.783,79.27 CNT.11 ; v1(47.371,77.343) 47.371,75.946 52.115,71.202 52.115,59.772 57.658,54.229 v1(57.658,53.975)
  Bottom Layer w0.6: CNT.11 44.704,80.01 v1(47.371,77.343) ; v1(57.658,53.975) 62.865,48.768 63.119,48.768
NetCNT_12: "Decoder 2.1" CNT.12 | length 29.1
  Top Layer w0.6: v1(47.371,79.883) 47.625,79.883 60.896,66.611 60.896,66.23 v1@61.023,66.103
  Bottom Layer w0.6: CNT.12 44.704,82.55 v1(47.371,79.883) ; v1(60.96,66.04) 62.992,64.008
NetCNT_13: "Decoder 2.2" CNT.13 | length 37
  Top Layer w0.6: v1@48.578,82.486 63.837,67.227 v1@63.837,66.421 ; 63.119,62.058 63.582,61.595
  Bottom Layer w0.6: CNT.13 45.593,85.09 v1(48.387,82.296) ; v1@63.5,66.294 63.964,66.294 65.069,65.189 65.069,62.656 63.881,61.468
  other v1: 63.542,66.421
NetCNT_14: "Decoder 2.6" CNT.14 | length 51.3
  Top Layer w0.6: v1(50.546,83.439) 50.292,83.439 66.294,67.437 v1(66.294,66.421) ; 63.119,51.308 63.119,51.898
  Bottom Layer w0.6: CNT.14 42.523,86.89 47.095,86.89 v1(50.546,83.439) ; 63.927,51.898 67.31,55.281 67.31,65.405 v1(66.294,66.421)
NetD0_1: D1.1 Digital.6 | length 3.5
  Bottom Layer w0.6: D1.1 Digital.6
NetD1_1: D2.1 Digital.7 | length 9.2
  Bottom Layer w0.6: D2.1 Digital.7
NetD2_1: D3.1 Digital.8 | length 3.5
  Bottom Layer w0.6: D3.1 Digital.8
NetD3_1: D4.1 Digital.9 | length 9.2
  Bottom Layer w0.6: D4.1 Digital.9
NetD4_1: D5.1 Digital.10 | length 3.5
  Bottom Layer w0.6: D5.1 Digital.10
NetJOYSTICK_3: JOYSTICK.3 LL?.3 | length 7.8
  Bottom Layer w0.6: LL?.3 135.509,89.408 135.509,93.091 137.16,94.742 JOYSTICK.3 JOYSTICK.3@137.287,96.012
NetJOYSTICK_4: JOYSTICK.4 LL?.1 | length 10
  Bottom Layer w0.6: JOYSTICK.4 139.7,92.964 140.081,92.583 141.732,92.583 LL?.1
NetLM324_2: LM324.2 R2.2 R4.1 | length 6.6
  Bottom Layer w0.6: LM324.2 121.009,49.679 121.009,49.673 121.158,49.524 R2.2 R4.1
NetLM324_3: LM324.3 R5.1 R6.2 | length 15.1
  Bottom Layer w0.6: LM324.3@122.682,50.292 122.682,49.53 124.333,47.879 124.333,41.656 R6.2 R5.1
NetLM324_6: LM324.6 LM324.7 R5.2 | length 13.3
  Bottom Layer w0.6: LM324.6 LM324.7 133.731,49.657 R5.2
NetLM324_8: LM324.8 LM324.9 | length 2.5
  Bottom Layer w0.6: LM324.9 LM324.8
NetLM324_10: LM324.10 R72.2 R77.1 | length 15.5
  Bottom Layer w0.6: LM324.10 127.889,57.277 130.175,54.991 135.763,54.991 136.906,56.134 R77.1 R72.2
NetLM324_12: LM324.12 R720.2 R770.1 | length 18.1
  Bottom Layer w0.6: R770.1 111.379,57.531 R720.2 113.411,57.785 116.078,55.118 121.285,55.118 122.809,56.642 LM324.12
NetLM324_13: LM324.13 LM324.14 | length 2.5
  Bottom Layer w0.6: LM324.14 LM324.13
NetLM339_8: LM339.8 LM339.14 | length 23.6
  Top Layer w0.6: v2(119.126,62.738) 136.017,62.738 v2(136.398,63.119)
  Bottom Layer w0.6: v2@118.999,63.119 LM339.8 ; LM339.14 135.001,65.532 136.398,64.135 v2(136.398,63.119)
NetLM339_9: LM339.9 R7221.2 R7711.1 | length 17.9
  Bottom Layer w0.6: R7711.1 R7221.2 114.808,62.103 115.951,60.96 120.523,60.96 121.539,61.976 LM339.9
NetLM339_10: LM339.10 LM339.13 | length 10.5
  Bottom Layer w0.6: LM339.10 124.079,66.294 125.857,68.072 129.667,68.072 131.699,66.04 LM339.13
NetLM339_11: LM339.11 R721.2 R772.1 | length 26.5
  Top Layer w0.6: v2(126.619,60.833) 139.573,60.833 v2(141.859,63.119)
  Bottom Layer w0.6: v2(126.619,60.833) LM339.11 ; R772.1 R721.2 140.716,65.786 141.859,64.643 v2(141.859,63.119)
NetR1_1: R1.1 T!1.3 | length 5.8
  Bottom Layer w0.6: T!1.3 131.572,30.226 R1.1
NetR3_1: R3.1 R7.2 T!1.1 | length 10.2
  Bottom Layer w0.6: T!1.1 136.144,32.766 R7.2 137.668,31.242 R3.1
Q4: Analogico.5 J1.1 XNOR.1 | length 42.7
  Top Layer w0.6: v2(22.987,10.033) 22.987,18.796 25.273,21.082 ; v2(27.305,21.082) 25.273,21.082 ; v2(27.813,28.194) 27.813,23.622 25.273,21.082
  Bottom Layer w0.6: v2(22.987,10.033) 22.987,9.652 23.876,8.763 29.718,8.763 30.607,9.652 XNOR.1 ; J1.1 25.781,19.558 v2(27.305,21.082) ; v2(27.813,28.194) 27.789,28.218 27.789,34.52 Analogico.5
RAMPA: LM324.1 LM339.4 LM339.6 Not.5 R2.1 RST.1@126.746,92.329 | length 343.8
  Top Layer w0.6: v2(9.398,53.721) 9.398,59.436 20.066,70.104 v1(25.654,70.104) ; v2(121.285,78.359) 121.285,80.772 v2(126.746,86.233)
  Bottom Layer w0.6: v2(9.398,53.721) 9.144,53.721 2.159,46.736 2.159,9.017 9.906,1.27 79.375,1.27 88.392,10.287 88.392,27.813 95.885,35.306 116.205,35.306 117.729,36.83 117.729,40.811 116.735,41.805 ; v1(25.654,70.104) 25.397,69.847 25.397,63.243 27.553,61.087 Not.5 ; R2.1 114.427,47.117 LM324.1 117.729,42.799 116.735,41.805 ; v2(121.285,78.359) v2@121.539,78.613 ; LM339.4@126.619,73.533 v2@121.539,78.613 ; v2(126.746,86.233) RST.1@126.746,92.329 ; 116.735,41.805 114.316,41.805 111.373,38.862 110.109,38.862 108.561,40.41 108.561,73.636 113.919,78.994 116.078,78.994 116.713,78.359 116.713,72.644 118.491,70.866 119.888,70.866 121.539,72.517 LM339.6 121.412,73.279 v2@121.539,78.613
RESET: AND2.5 LM339.2 RST.4 | length 205.3
  Top Layer w0.6: v2(77.851,32.385) 77.851,16.734 77.817,16.7 77.817,15.304 77.851,15.27 77.851,14.478 90.678,1.651 138.176,1.651 147.574,11.049 147.574,73.279 144.399,76.454 v2(129.921,76.454)
  Bottom Layer w0.6: AND2.5 76.835,33.528 77.851,32.512 v2(77.851,32.385) ; RST.4@118.999,92.329 119.38,91.948 119.38,86.868 131.699,74.549 LM339.2 LM339.2@131.826,73.279
RST: AND2.6 CNT.7 CNT.15 CNT_RST.1 | length 273.7
  Top Layer w0.6: v1(15.621,83.439) 15.748,83.439 v1(22.225,89.916) ; v1(31.75,77.851) 31.75,93.853 32.766,94.869 43.307,94.869 44.196,93.98 v1(44.196,88.9) ; CNT.7 CNT.7@34.163,78.06 ; v1(82.423,33.782) 82.55,33.655 v1(86.487,33.655)
  Bottom Layer w0.6: v1(15.621,83.439) 15.621,82.931 15.303,83.248 11.557,79.502 11.557,53.213 4.191,45.847 4.191,9.906 11.43,2.667 77.978,2.667 86.487,11.176 v1(86.487,33.655) ; v1(22.225,89.916) 22.225,78.359 CNT_RST.1 ; CNT_RST.1@22.479,78.359 22.86,77.978 CNT_RST.1 ; CNT.7 33.782,77.851 CNT_RST.1 ; CNT.15 41.867,90.086 43.01,90.086 v1(44.196,88.9) ; AND2.6 80.264,36.068 82.423,33.909 v1(82.423,33.782)
TRI: 2KHz.2 2KHz.6 C21.1 R78.1 | length 57.6
  Top Layer w0.6: v2(101.727,22.733) 101.727,26.289 105.41,29.972 v2(105.664,29.972)
  Bottom Layer w0.6: C21.1 97.536,11.43 2KHz.6 96.901,12.071 94.875,14.097 91.821,14.097 90.043,15.875 90.043,26.035 94.107,30.099 105.537,30.099 v2(105.664,29.972) ; R78.1 98.552,20.574 2KHz.2 99.441,20.447 v2(101.727,22.733)
VCC: 1M5.2 2KHz.4 2KHz.8 "Decoder 2.3" "Decoder 2.4" "Decoder 2.16" "Regulador de Tensión.3" "RESET RR.1" "RR COUNTER.2" "RR COUNTER.16" AND2.14 AND.14 C11.1 C12.1 C13.1 C14.1 C15.1 C16.1 C17.1 C18.1 C19.1 C20.1 C31.1 C32.1 C33.1 CNT.16 COMP.3 COMP.16 Decoder1.3 Decoder1.4 Decoder1.16 Digital.1 Digital.2 Digital.3 Digital.4 Digital.5 FFD.14 JOYSTICK.2 LM324.4 LM339.3 Not.14 R4.2 R77.2 R79.1 R770.2 R772.2 R7711.2 XNOR.5 XNOR.8 XNOR.12 XNOR.14 | length 794.9
  Top Layer w0.6: v2(29.972,22.86) 29.972,26.543 31.22,27.791 31.22,40.624 31.623,41.027 v2(31.623,46.99) 31.623,47.244 31.496,47.117 v2@31.496,46.99 ; v2(44.958,46.609) 47.117,46.609 49.911,43.815 v2(56.896,43.815) ; v1@46.228,90.932 53.467,90.932 v1(53.721,90.678) ; v1(68.326,72.009) 70.739,69.596 v1(70.739,67.945) ; v1(70.485,8.128) 73.66,8.128 75.692,10.16 75.692,12.7 ; v1(70.739,18.796) 70.739,18.669 75.692,13.716 75.692,12.7 ; v2(86.995,1.651) 86.741,1.651 75.692,12.7 ; v2(94.107,24.384) 94.107,25.146 v2(110.744,41.783) ; v2(105.029,5.334) 105.029,9.017 v2(105.156,9.144) ; v2(110.236,69.85) 107.569,67.183 107.569,44.958 v2(110.744,41.783) ; v2(135.509,46.228) 133.858,44.577 v2(127.127,44.577) 124.46,44.577 121.688,41.805 110.766,41.805 v2(110.744,41.783)
  Bottom Layer w0.6: 1M5.2 9.398,14.859 7.493,16.764 7.493,38.87 10.287,41.664 Digital.5 12.082,47.642 13.572,47.642 ; Digital.4 13.623,46.643 13.623,47.591 13.637,47.577 15.367,47.577 ; Digital.3 15.367,47.577 ; Digital.2 17.907,47.577 ; Not.14@19.349,51.517 19.199,51.667 19.193,51.667 18.139,52.721 18.139,52.727 16.129,54.737 16.129,80.772 18.542,83.185 18.542,92.71 24.765,98.933 63.5,98.933 Decoder1.16 ; Not.14 19.939,48.514 ; C12.1 21.844,48.514 19.939,48.514 ; XNOR.14 v2(29.972,22.86) COMP.16 ; C31.1 XNOR.14@30.734,18.288 ; XNOR.12 35.687,19.431 COMP.16 ; C13.1@39.37,92.71 CNT.16 43.561,92.71 45.212,91.059 v1(46.736,91.059) ; COMP.3 38.354,27.178 37.211,26.035 C17.1 35.56,25.654 35.56,24.003 33.655,22.098 COMP.16 ; XNOR.5 40.767,9.017 41.91,7.874 48.895,7.874 50.165,9.144 50.165,16.637 ; XNOR.8 45.847,18.034 47.244,16.637 50.165,16.637 ; C11.1 49.53,65.913 AND.14 55.626,65.913 ; 49.709,37.846 50.949,39.086 50.949,43.158 47.498,46.609 v2(44.958,46.609) 32.131,46.609 31.496,47.244 24.511,47.244 23.622,46.355 20.955,46.355 Digital.1 20.876,46.276 20.876,47.577 ; v1(53.721,90.678) 57.531,86.868 Decoder1.3 ; v2(56.896,43.815) 56.769,43.815 56.769,40.386 58.928,42.545 58.928,45.72 ; C32.1 58.42,46.228 58.928,45.72 ; 62.529,55.798 63.119,56.388 63.119,58.928 62.901,58.928 ; 62.611,58.928 55.626,65.913 ; Decoder1.4 Decoder1.3 ; 63.944,27.241 64.008,27.305 C14.1@65.913,27.305 ; v1@68.535,71.964 68.535,81.198 Decoder1.3 ; v1(70.485,8.128) 69.088,8.128 68.326,8.89 FFD.14@68.326,10.795 ; C33.1@70.485,10.795 FFD.14@68.326,10.795 ; v1(70.739,18.796) 70.612,18.796 68.199,21.209 AND2.14 66.929,23.368 65.539,24.758 65.539,25.266 62.992,27.813 62.992,34.39 65.151,36.549 65.151,42.291 63.5,43.942 61.849,43.942 60.071,45.72 58.928,45.72 ; C16.1 Decoder1.16 ; C15.1 72.644,64.008 70.739,64.008 v1(70.739,67.945) 70.739,68.453 58.674,68.453 56.134,65.913 55.626,65.913 ; v2(86.995,1.651) 132.08,1.651 134.239,3.81 134.239,7.112 132.334,9.017 132.334,6.604 130.683,4.953 105.156,4.953 105.029,5.08 v2(105.029,5.334) ; v2(94.107,24.384) 94.107,19.939 2KHz.4 94.361,19.05 95.885,17.526 96.774,17.526 101.981,12.319 2KHz.8 2KHz.8@102.108,11.938 ; 2KHz.8@102.362,11.684 2KHz.8@102.108,11.938 ; 105.791,9.779 R79.1 ; C20.1 R79.1 ; v2(110.236,69.85) 110.109,69.85 111.76,71.501 ; R770.2 110.49,47.117 R4.2@113.411,44.196 ; v2(110.744,41.783) 113.157,44.196 R4.2@113.411,44.196 ; R7711.2 111.76,71.501 ; R4.2 R4.2@113.411,44.196 ; LM324.4@124.714,51.054 C19.1 ; LM324.4 125.349,49.276 127.127,47.498 v2(127.127,44.577) ; JOYSTICK.2 134.62,94.234 131.445,91.059 131.445,83.217 138.303,76.359 R772.2 135.509,70.485 131.318,70.485 129.159,72.644 LM339.3 129.159,72.898 128.435,72.174 128.435,70.739 C18.1 125.387,70.015 125.387,69.696 123.128,67.437 113.792,67.437 111.76,69.469 111.76,71.501 ; v2(135.509,46.228) 135.382,46.355 135.382,48.895 R77.2 ; 15.367,47.577 17.907,47.577 ; 17.907,47.577 20.876,47.577 ; 19.939,48.514 20.876,47.577 ; 50.165,16.637 54.737,12.065 67.056,12.065 FFD.14@68.326,10.795 ; Decoder1.3 63.605,87.608 64.665,87.608 69.005,91.948 Decoder1.16 ; 2KHz.8@102.108,11.938 R79.1
VDD: 
X0: "RR COUNTER.3" AND.9 COMP.9 | length 45.5
  Top Layer w0.6: v2(37.846,48.895) 37.846,47.752 v2(40.894,44.704)
  Bottom Layer w0.6: COMP.9 33.02,43.18 34.671,44.831 42.799,44.831 46.736,40.894 46.736,37.719 49.149,35.306 ; v2(37.846,48.895) 37.868,48.873 45.317,48.873 49.657,53.213 AND.9
X1: "RR COUNTER.4" AND.10 COMP.11 | length 55.1
  Bottom Layer w0.6: COMP.11 34.717,34.798 35.303,35.384 35.303,41.78 36.501,42.978 42.112,42.978 44.45,40.64 44.45,36.195 47.752,32.893 49.022,32.893 49.149,32.766 52.049,35.666 52.049,53.875 50.171,55.753 AND.10
X2: "RR COUNTER.5" AND.12 COMP.14 | length 70.1
  Bottom Layer w0.6: COMP.14 33.401,27.178 36.703,30.48 36.703,39.497 38.884,41.678 41.386,41.678 42.799,40.265 42.799,35.687 43.772,34.714 43.772,32.428 46.101,30.099 49.022,30.099 49.149,30.226 53.467,34.544 53.467,57.537 50.171,60.833 AND.12
X3: "RR COUNTER.6" AND.13 COMP.1 | length 51.6
  Bottom Layer w0.5: COMP.1 43.561,22.098 49.149,27.686 54.864,33.401 54.864,60.071 51.562,63.373 AND.13
X4: "RR COUNTER.11" XNOR.2 | length 55.9
  Top Layer w0.6: XNOR.2 XNOR.2@33.283,10.795 ; v1(33.274,5.969) 34.29,4.953 50.165,4.953 51.181,5.969 51.181,18.702 52.164,19.685 59.055,19.685 61.121,21.751 61.121,24.223 v2(60.96,24.384)
  Bottom Layer w0.6: v1(33.274,5.969) XNOR.2@33.274,10.668 ; XNOR.2@33.283,10.795 XNOR.2@33.342,10.736 ; 56.769,27.686 57.658,27.686 v2(60.96,24.384)
XOR1: AND2.1 XNOR.3 | length 66.5
  Bottom Layer w0.6: XNOR.3 35.687,6.985 36.44,6.232 73.161,6.232 81.28,14.351 81.28,21.59 79.502,23.368 AND2.1
pads on no net: "RR COUNTER.12" "RR COUNTER.13" "RR COUNTER.14" AND2.8 AND.3 AND.11 COMP.5 COMP.7 FFD.2 FFD.8 FFD.9 FFD.10 FFD.11 FFD.12 FFD.13 JOYSTICK.5 Not.10 Not.12 XNOR.4 XNOR.10 XNOR.11

## Polygon pours and split planes (outlines as drawn)
GND on Bottom Layer "Bottom Layer-No Net" (solid, pour order 2): 0,100 150,100 150,0 0,0

## Keep-outs
Keep-Out Layer:
  the board outline again, w0.254

## Other copper
Bottom Layer:
  pour cut-out: 113.919,100 112.903,98.984 112.903,76.708 105.283,69.088 105.791,68.58 105.791,39.624 98.933,32.766 89.789,32.766 89.789,2.921 92.71,0 92.837,0.127 92.837,1.27 92.71,1.27 90.551,3.429 90.805,3.683 90.805,31.369 99.441,31.369 107.061,38.989 107.061,69.088 114.681,76.708 114.554,76.835 114.554,100

## Silkscreen, mask and mechanical layers (free items; w line width, h text height)
Top Overlay:
  text "RMP" at 127.635,94.361 h1.52 r90
  text "JYST" at 122.555,94.107 h1.52 r90
  text "ECNT" at 125.095,94.107 h1.52 r90
  text "Grupo 4" at 13.843,80.518 h1.92 r90
  text "Ejercicio 8" at 9.271,73.406 h1.92 r90
  text "Electronica III - TP2" at 4.318,55.118 h1.92 r90
  text "GND" at 110.363,3.683 h1.52
  text "15V" at 115.443,3.683 h1.52